# EAGLE board telemetry-shorter (EAGLE 7.7.0)
REV: C
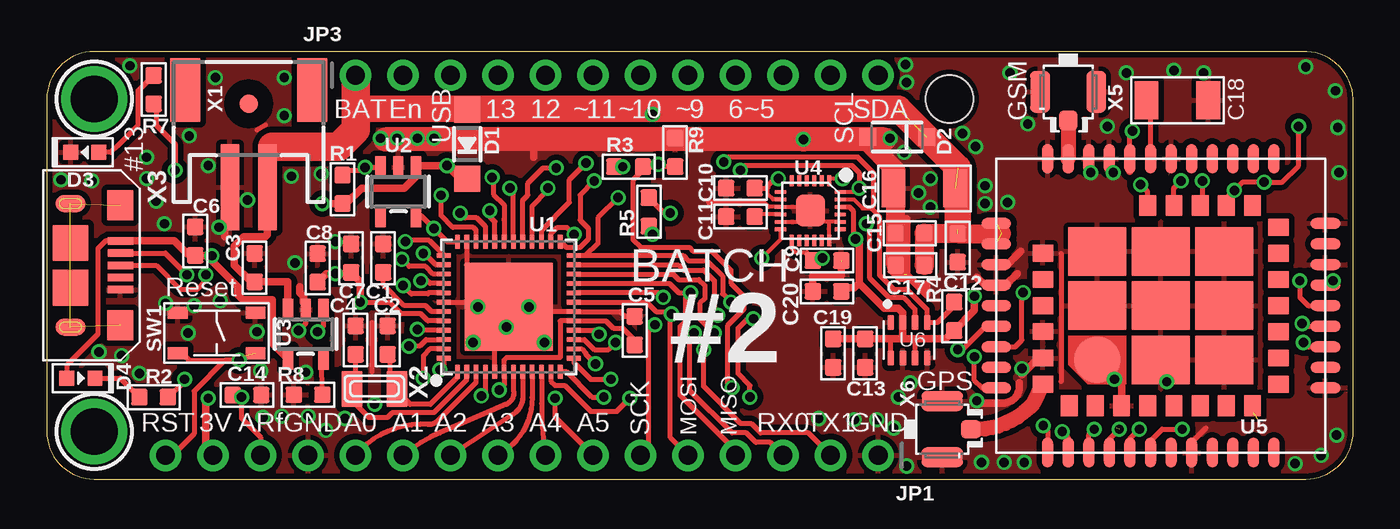
[diagram p0: board, top side]
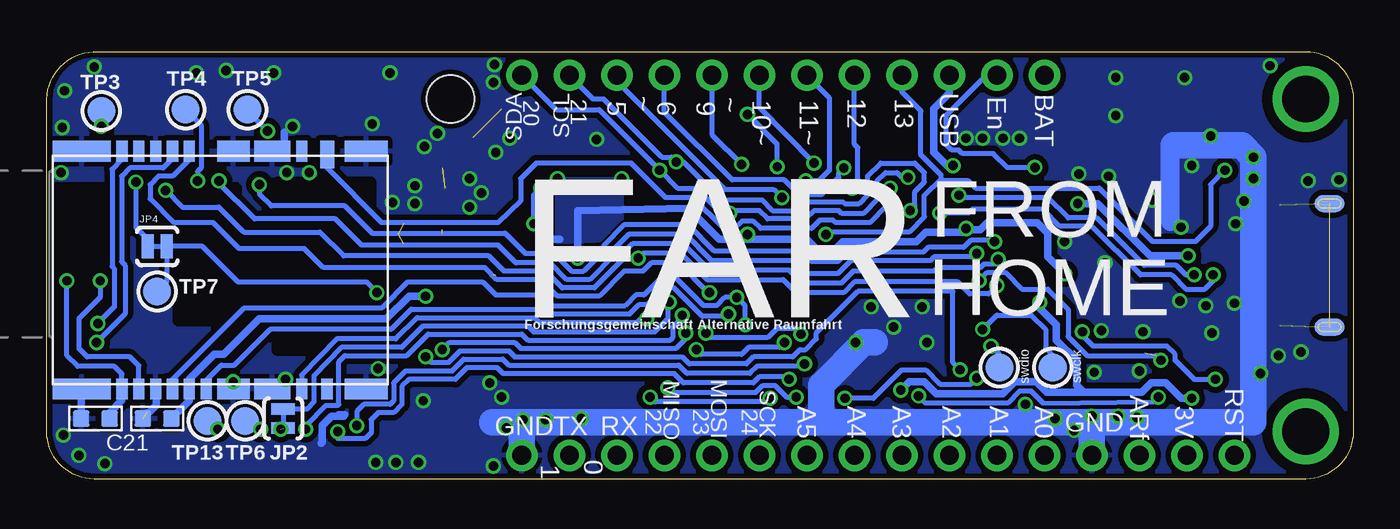
[diagram p1: board, bottom side, seen from below]

Size 69.85 x 22.86 mm. Coordinates in mm from the lower left corner, seen from the top.
Outline: 2.54,0 67.31,0 arc90 69.85,2.54 69.85,20.32 arc90 67.12,22.86 2.54,22.86 arc90 0,20.32 0,2.54 arc90 2.54,0
Copper layers (1*16): Top 0.035mm / dielectric 1.5mm / Bottom 0.035mm
Design rules "MacroFab_MF_Standard_2_Layer": minimum track width 5mil, minimum drill 12mil, track to track 5mil, track to pad 5mil, pad to pad 5mil, via to via 5mil, smd to smd 0mil, copper to edge 10mil, drill to drill 10mil, minimum pad ring 6mil, minimum via ring 6mil, stop-mask expansion 2mil, vias tented up to drill 25mil, thermal gap 10mil
Holes 2.54 mm at 48.26,20.32

## Footprints (pad centres in the part's own frame; a part is rotated, then mirrored left to right if it is on the bottom)
C0603 = smd 0.889 x 0.889: 1 0,0.762; 2 0,-0.762
C1206 = smd 1.27 x 2.032: 1 -1.651,0; 2 1.651,0
SOD-123 = smd 1.4 x 1.4: A 1.85,0; C -1.85,0
SOD-123' = smd 0.9 x 0.95: A 1.575,0; C -1.575,0
LED0603 = smd 0.8 x 0.8: ANODE 0.75,0; CATHODE -0.75,0
1X16_ROUND = drill 1 pad 1.676: 1 -19.05,0; 2 -16.51,0; 3 -13.97,0; 4 -11.43,0; 5 -8.89,0; 6 -6.35,0; 7 -3.81,0; 8 -1.27,0; 9 1.27,0; 10 3.81,0; 11 6.35,0; 12 8.89,0; 13 11.43,0; 14 13.97,0; 15 16.51,0; 16 19.05,0
PAD-JUMPER-2-NC_BY_TRACE_YES_SILK = smd 0.635 x 1.27: 1 -0.508,0; 2 0.508,0
1X12_ROUND = drill 1 pad 1.676: 1 -13.97,0; 2 -11.43,0; 3 -8.89,0; 4 -6.35,0; 5 -3.81,0; 6 -1.27,0; 7 1.27,0; 8 3.81,0; 9 6.35,0; 10 8.89,0; 11 11.43,0; 12 13.97,0
R0603 = smd 0.889 x 0.889: 1 0,0.762; 2 0,-0.762
TACT4.2MM = smd 1.05 x 0.65: P$1 -2.075,1.075; P$2 2.075,1.075; P$3 -2.075,-1.075; P$4 2.075,-1.075
TESTPOINT_ROUND_1.5MM = smd 1.5 x 1.5: P$1 0,0
TQFN48_7MM = smd 0.25 x 0.75: 1 -2.75,-3.475; 2 -2.25,-3.475; 3 -1.75,-3.475; 4 -1.25,-3.475; 5 -0.75,-3.475; 6 -0.25,-3.475; 7 0.25,-3.475; 8 0.75,-3.475; 9 1.25,-3.475; 10 1.75,-3.475; 11 2.25,-3.475; 12 2.75,-3.475; 25 2.75,3.475; 26 2.25,3.475; 27 1.75,3.475; 28 1.25,3.475; 29 0.75,3.475; 30 0.25,3.475; 31 -0.25,3.475; 32 -0.75,3.475; 33 -1.25,3.475; 34 -1.75,3.475; 35 -2.25,3.475; 36 -2.75,3.475 | smd 0.75 x 0.25: 13 3.475,-2.75; 14 3.475,-2.25; 15 3.475,-1.75; 16 3.475,-1.25; 17 3.475,-0.75; 18 3.475,-0.25; 19 3.475,0.25; 20 3.475,0.75; 21 3.475,1.25; 22 3.475,1.75; 23 3.475,2.25; 24 3.475,2.75; 37 -3.475,2.75; 38 -3.475,2.25; 39 -3.475,1.75; 40 -3.475,1.25; 41 -3.475,0.75; 42 -3.475,0.25; 43 -3.475,-0.25; 44 -3.475,-0.75; 45 -3.475,-1.25; 46 -3.475,-1.75; 47 -3.475,-2.25; 48 -3.475,-2.75 | smd 4.7 x 4.7: THERMAL 0,0
SOT23-5 = smd 0.55 x 1.2: 1 -0.95,-1.3; 2 0,-1.3; 3 0.95,-1.3; 4 0.95,1.3; 5 -0.95,1.3
LEAD-QFN24 = smd 0.6 x 0.2: 1 -1.6,1; 2 -1.6,0.6; 3 -1.6,0.2; 4 -1.6,-0.2; 5 -1.6,-0.6; 6 -1.6,-1; 13 1.6,-1; 14 1.6,-0.6; 15 1.6,-0.2; 16 1.6,0.2; 17 1.6,0.6; 18 1.6,1 | smd 0.2 x 0.6: 7 -1,-1.6; 8 -0.6,-1.6; 9 -0.2,-1.6; 10 0.2,-1.6; 11 0.6,-1.6; 12 1,-1.6; 19 1,1.6; 20 0.6,1.6; 21 0.2,1.6; 22 -0.2,1.6; 23 -0.6,1.6; 24 -1,1.6 | smd 1.7 x 1.54: 25 0,0
SIM868 = smd 1.6 x 0.6: 1_ -7.85,6.05; 2_ -7.85,4.95; 3_ -7.85,3.85; 4_ -7.85,2.75; 5_ -7.85,1.65; 6_ -7.85,0.55; 7_ -7.85,-0.55; 8_ -7.85,-1.65; 9_ -7.85,-2.75; 10_ -7.85,-3.85; 11_ -7.85,-4.95; 12_ -7.85,-6.05; 22_ 7.85,-6.05; 23_ 7.85,-4.95; 24_ 7.85,-3.85; 25_ 7.85,-2.75; 26_ 7.85,-1.65; 27_ 7.85,-0.55; 28_ 7.85,0.55; 29_ 7.85,1.65; 30_ 7.85,2.75; 31_ 7.85,3.85; 32_ 7.85,4.95; 33_ 7.85,6.05 | smd 0.6 x 1.6: 13_ -4.4,-8.8; 14_ -3.3,-8.8; 15_ -2.2,-8.8; 16_ -1.1,-8.8; 17_ 0,-8.8; 18_ 1.1,-8.8; 19_ 2.2,-8.8; 20_ 3.3,-8.8; 21_ 4.4,-8.8; 34_ 4.4,8.8; 35_ 3.3,8.8; 36_ 2.2,8.8; 37_ 1.1,8.8; 38_ 0,8.8; 39_ -1.1,8.8; 40_ -2.2,8.8; 41_ -3.3,8.8; 42_ -4.4,8.8 | smd 1.1 x 0.9: 43_ -5.35,4.9; 44_ -5.35,3.5; 45_ -5.35,2.1; 46_ -5.35,0.7; 47_ -5.35,-0.7; 48_ -5.35,-2.1; 49_ -5.35,-3.5; 50_ -5.35,-4.9; 58_ 5.35,-4.9; 59_ 5.35,-3.5; 60_ 5.35,-2.1; 61_ 5.35,-0.7; 62_ 5.35,0.7 | smd 0.9 x 1.1: 51_ -4.2,-6.3; 52_ -2.8,-6.3; 53_ -1.4,-6.3; 54_ 0,-6.3; 55_ 1.4,-6.3; 56_ 2.8,-6.3; 57_ 4.2,-6.3; 63_ 2.8,6.3; 64_ 1.4,6.3; 65_ 0,6.3; 66_ -1.38,6.3; 67_ -2.8,6.3; 68_ -4.2,6.3 | smd 2.5 x 2.5: 69_ -2.9,3.4 | smd 2.6 x 3.1: 70_ -2.9,0; 71_ -2.9,-3.4; 72_ 0,-3.4; 73_ 2.9,-3.4; 74_ 2.9,0; 75_ 2.9,3.4; 76_ 0,3.4; 77_ 0,0
LGA-8 = smd 0.8 x 0.35: P1 0.95,0.975; P2 0.95,0.325; P3 0.95,-0.325; P4 0.95,-0.975; P5 -0.95,-0.975; P6 -0.95,-0.325; P7 -0.95,0.325; P8 -0.95,0.975
MOUNTINGHOLE_2.5_PLATED = drill 2.5 pad 3.2: P$1 0,0
FIDUCIAL_1MM = smd 1 x 1: 1 0,0
JSTPH2 = smd 1 x 4.6: 1 -1,-3.7; 2 1,-3.7 | smd 1.6 x 3.4: NC1 -3.4,1.5; NC2 3.4,1.5
XTAL3215 = smd 1.1 x 1.9: P$1 1.2,0; P$2 -1.2,0
MICROUSB-RIGHT = smd 0.4 x 1.35: 1 -1.3,1.27; 2 -0.65,1.27; 3 0,1.27; 4 0.65,1.27; 5 1.3,1.27 | smd 0.9 x 1.6: S1 -3.3,-1.4; S2 3.3,-1.4 | smd 1.6 x 1.4: S3 -3.2,1.27; S4 3.2,1.27 | smd 1.9 x 1.9: S5 -1.2,-1.405; S6 1.2,-1.405 | smd 0.9 x 1.6 bottom: S7 -3.3,-1.4; S8 3.3,-1.4
MOLEX-SD+SIM-104239 = smd 1.1 x 0.6: C1 6.35,-5.25; C2 6.35,-4.35; C3 -6.35,-5.25; C5 6.35,-3.45; C6 -6.35,-4.35; C7 -6.35,-2.55; T1 6.35,5.715; T2 6.35,4.36; T3 6.35,-0.75; T4 6.35,-1.65; T5 6.35,-2.55; T6 -6.35,-3.45; T7 -6.35,-1.65; T8 -6.35,4.36 | smd 1.1 x 3.1: G1 -6.35,-7.4; G8 6.35,-7.4 | smd 1.1 x 1.72: G2 -6.35,0.71; G7 6.35,0.71 | smd 1.1 x 1.94: G3 -6.35,2.79; G6 6.35,2.79 | smd 1.1 x 2.3: G4 -6.35,7.8; G5 6.35,7.8 | smd 1.45 x 0.75: S/W -6.175,5.715
U-FL3P-SMD-2.6X2.6X1.0MM = smd 1.05 x 1: D -1.524,0 | smd 2.2 x 1.05: GND1 0,1.5; GND2 0,-1.5

## Placement (x,y rotation side)
C1  1uf  [C0603]  17.98,11.81 180 top
C2  22pf  [C0603]  18.22,7.43 180 top
C3  10uf  [C0603]  11.11,11.3 180 top
C4  22pf  [C0603]  16.51,7.43 180 top
C5  10uf  [C0603]  31.43,7.94 180 top
C6  10uf  [C0603]  7.93,12.72 180 top
C7  1uf  [C0603]  16.27,11.81 180 top
C8  10uf  [C0603]  14.48,11.29 180 top
C9  100nf  [C0603]  41.72,11.68 270 top
C10  10nf  [C0603]  37.08,15.56 90 top
C11  100nf  [C0603]  37.08,14.03 90 top
C12  10pf  [C0603]  48.7,12.36 0 top
C13  100nf  [C0603]  43.75,6.73 180 top
C14  1uf  [C0603]  10.7,4.5 90 top
C15  33pf  [C0603]  46.14,13.14 270 top
C16  100uf  [C1206]  46.93,15.54 180 top
C17  10uf  [C0603]  46.16,11.43 270 top
C18  100uf  [C1206]  60.45,20.26 0 top
C19  10nf  [C0603]  42.04,6.73 180 top
C20  10uf  [C0603]  41.72,10.03 90 top
C21  100nf  [C0603]  67.25,3.24 90 bottom
C28  10uf  [C0603]  63.94,3.24 90 bottom
D1  MBR120ESFT3G  [SOD-123]  22.48,17.91 90 top
D2  MMSZ5231BT1G  [SOD-123']  45.47,18.29 180 top
D3  MF-LED-0603-RED  [LED0603]  2.03,17.46 0 top
D4  MF-LED-0603-GREEN  [LED0603]  1.83,5.4 180 top
JP1  [1X16_ROUND]  25.4,1.27 180 top
JP2  JUMPER-PAD-2-NC_BY_TRACE  [PAD-JUMPER-2-NC_BY_TRACE_YES_SILK]  57.21,3.24 270 bottom
JP3  [1X12_ROUND]  30.48,21.59 0 top
JP4  JUMPER-PAD-2-NC_BY_TRACE  [PAD-JUMPER-2-NC_BY_TRACE_YES_SILK]  63.94,12.45 0 bottom
R1  100K  [R0603]  15.81,15.49 180 top
R2  1K  [R0603]  5.71,4.38 90 top
R3  100K  [R0603]  31.11,16.7 90 top
R4  4.7K  [R0603]  48.51,8.7 0 top
R5  4.7K  [R0603]  32.19,14.29 0 top
R7  1K  [R0603]  5.71,20.83 180 top
R8  10K  [R0603]  13.97,4.51 270 top
R9  100K  [R0603]  33.59,17.46 180 top
SW1  MF-SW-TACT-4.2MM  [TACT4.2MM]  9.08,7.81 180 top
TP1  [TESTPOINT_ROUND_1.5MM]  16.07,5.97 0 bottom
TP2  [TESTPOINT_ROUND_1.5MM]  18.92,5.97 0 bottom
TP3  [TESTPOINT_ROUND_1.5MM]  66.93,19.68 0 bottom
TP4  [TESTPOINT_ROUND_1.5MM]  62.42,19.75 0 bottom
TP5  [TESTPOINT_ROUND_1.5MM]  59.12,19.75 0 bottom
TP6  [TESTPOINT_ROUND_1.5MM]  59.25,3.11 0 bottom
TP7  [TESTPOINT_ROUND_1.5MM]  63.94,10.03 0 bottom
TP13  [TESTPOINT_ROUND_1.5MM]  61.25,3.11 0 bottom
U1  ATSAMD21G18A-MUT  [TQFN48_7MM]  24.7,9.21 0 top
U2  SPX3819M5-L-3-0  [SOT23-5]  18.8,15.37 180 top
U3  MCP73831T-2ACI/OT  [SOT23-5]  13.84,7.75 180 top
U4  MPU-9250  [LEAD-QFN24]  40.83,14.35 270 top
U5  SIM868  [SIM868]  59.56,9.27 90 top
U6  BMP280  [LGA-8]  46.1,7.43 90 top
U$31  MOUNTINGHOLE2.5  [MOUNTINGHOLE_2.5_PLATED]  2.54,20.32 270 top
U$32  MOUNTINGHOLE2.5  [MOUNTINGHOLE_2.5_PLATED]  2.54,2.54 270 top
U$34  FIDUCIAL""  [FIDUCIAL_1MM]  10.79,20.07 270 top
X1  S2B-PH-SM4-TB(LF)(SN)  [JSTPH2]  10.79,19.3 0 top
X2  FC-135 32.7680KA-A3  [XTAL3215]  17.53,4.83 0 top
X3  MF-CON-MICROUSB-RIGHT  [MICROUSB-RIGHT]  2.67,11.43 270 top
X4  104239-1430  [MOLEX-SD+SIM-104239]  60.58,11.18 270 bottom
X5  U.FL-R-SMT(10)  [U-FL3P-SMD-2.6X2.6X1.0MM]  54.61,20.7 90 top
X6  U.FL-R-SMT(10)  [U-FL3P-SMD-2.6X2.6X1.0MM]  47.88,2.67 180 top

## Library data of the parts
C1 C7 C14 = Seeed-Capacitor-2016; MPN: CC0603KRX7R8BB105
C2 C4 = Seeed-Capacitor-2016; MPN: CC0603JRNPO9BN220
C3 C5 C6 C17 C20 C28 = Seeed-Capacitor-2016; MPN: CC0603KRX5R6BB106
C8 = Seeed-Capacitor-2016; COMPANY: ADAFRUIT INDUSTRIES; DRAWN: KTOWN; MPN: CC0603KRX5R6BB106; REV: A
C9 C11 C13 C21 = Seeed-Capacitor-2016; MPN: CC0603KRX7R9BB104
C10 C19 = Seeed-Capacitor-2016; MPN: CC0603KRX7R9BB103
C12 = Seeed-Capacitor-2016; MPN: CC0603JRNPO9BN100
C15 = Custom; MPN: CC0603JRNPO9BN330
C16 C18 = Seeed-Capacitor-2016; MPN: GRM31CR60J107ME39L
D1 JP1 JP3 TP1-TP7 TP13 U1-U3 X1 = microbuilder
D2 = Deegou-Diodes; MFR: ON SEMICONDUCTOR; MPN: MMSZ5231BT1G
D3 = MF_LEDs; HOUSEPART: YES; MPN: MF-LED-0603-RED; POPULATE: 1; URL: https://factory.macrofab.com/part/MF-LED-0603-RED
D4 = MF_LEDs; HOUSEPART: YES; MPN: MF-LED-0603-GREEN; POPULATE: 1; URL: https://factory.macrofab.com/part/MF-LED-0603-GREEN
JP2 JP4 = SparkFun-Passives
R1 = Seeed-Resistor-2016; MPN: RC0603JR-07100KL; VALUE: 100K 1/10W
R2 R7 = Seeed-Resistor-2016; MPN: RC0603JR-071KL; VALUE: 1K 1/10W
R3 R9 = Seeed-Resistor-2016; MPN: RC0603FR-07100KL
R4 R5 = Seeed-Resistor-2016; MPN: RC0603JR-074K7L
R8 = Seeed-Resistor-2016; MPN: RC0603JR-0710KL; VALUE: 10K 1/10W
SW1 = MF_Switches; HOUSEPART: YES; MPN: MF-SW-TACT-4.2MM; POPULATE: 1; URL: https://factory.macrofab.com/part/MF-SW-TACT-4.2MM
U4 = misc
U5 = SIM868
U6 = BMP280
U$31 U$32 U$34 = microbuilder; BOM: EXCLUDE
X2 = adafruit2
X3 = MF_Connectors; HOUSEPART: YES; MPN: MF-CON-MICROUSB-RIGHT; POPULATE: 1; URL: https://factory.macrofab.com/part/MF-CON-MICROUSB-RIGHT
X4 = SimSdCombo; MPN: VSHO-21-3301
X5 X6 = Seeed-Connector -2016

## Nets
!RESET: JP1.16 SW1.P$1 SW1.P$2 U1.40
+3V: C5.1 C7.1 C8.1 C9.2 C10.2 C13.2 C19.2 C20.2 C28.2 JP1.15 R4.2 R5.2 U1.6 U1.17 U1.36 U1.44 U2.5 U4.1 U4.8 U4.13 U4.22 U6.P2 U6.P6 U6.P8 X4.T4
A0: JP1.12 U1.3
A1: JP1.11 U1.7
A2: JP1.10 U1.8
A3: JP1.9 U1.9
A4: JP1.8 U1.10
A5: JP1.7 U1.47
AREF: C14.1 JP1.14 U1.4
D0/RX0/CTS2: JP1.3 U1.16
D1/TX0: JP1.2 U1.15
D3/RX2/GSM_TX: U1.14 U5.1_
D4/TX2/GSM_RX: U1.13 U5.2_
D5/CTS2: JP2.1 JP3.10 U1.24
D6: JP3.9 U1.29
D7/SD_DET: U1.30 X4.S/W
D8/SD_CS: U1.11 X4.T2
D9/VOLT: JP3.8 R3.2 R9.1 U1.12
D10: JP3.7 U1.27
D11: JP3.6 U1.25
D12: JP3.5 U1.28
D13/RLED: JP3.4 R7.1 U1.26
D+: U1.34 X3.3
D-: U1.33 X3.2
EN: JP3.2 R1.2 U2.3
GND: C1.2 C2.2 C3.2 C4.2 C5.2 C6.2 C7.2 C8.2 C9.1 C10.1 C11.1 C12.2 C13.1 C14.2 C15.2 C16.2 C17.2 C18.2 C19.1 C20.1 C21.1 C28.1 D2.A D3.CATHODE JP1.1 JP1.13 R8.2 R9.2 SW1.P$3 SW1.P$4 U1.5 U1.18 U1.35 U1.42 U1.THERMAL U2.2 U3.2 U4.9 U4.11 U4.18 U4.20 U4.25 U5.8_ U5.13_ U5.19_ U5.21_ U5.27_ U5.30_ U5.31_ U5.33_ U5.36_ U5.37_ U5.45_ U5.63_ U5.66_ U5.67_ U5.69_ U5.70_ U5.71_ U5.72_ U5.73_ U5.74_ U5.75_ U5.76_ U5.77_ U6.P1 U6.P5 U6.P7 X1.1 X3.5 X4.C5 X4.G1 X4.G2 X4.G3 X4.G4 X4.G5 X4.G6 X4.G7 X4.G8 X4.T6 X5.GND1 X5.GND2 X6.GND1 X6.GND2
GPS_1PPS: TP4.P$1 U5.60_
GPS_ANT: U5.68_ X6.D
GPS_EN: JP4.1 TP3.P$1 U1.39 U5.59_
GSM_ANT: U5.32_ X5.D
GSM_DCD: TP6.P$1 U5.5_
GSM_DTR: TP13.P$1 U5.6_
GSM_RI: U5.7_
MISO: JP1.4 U1.21 X4.T7
MOSI: JP1.5 U1.19 X4.T3
MPU_INT: U1.41 U4.12
N$1: D4.CATHODE R2.1
N$3: R2.2 U3.1
N$4: R8.1 U3.5
N$5: C2.1 U1.1 X2.P$1
N$6: JP2.2 U5.4_
N$7: C4.1 U1.2 X2.P$2
N$8: D3.ANODE R7.2
N$23: C11.2 U4.10
N$29: C18.1 U5.28_
NETLIGHT: U5.41_
PWRKEY: U1.22 U5.39_
RF_SYNC: TP5.P$1 U5.29_
RTS2: U1.23 U5.3_
RX5/GPS_TX: U1.38 U5.61_
SCK: JP1.6 U1.20 X4.T5
SCL: JP3.11 R4.1 U1.32 U4.23 U6.P4
SDA: JP3.12 R5.1 U1.31 U4.24 U6.P3
SIM2_VDD: U5.56_
SIM_CLK: U5.16_ X4.C3
SIM_DATA: U5.15_ X4.C7
SIM_RST: U5.17_ X4.C2
SIM_VDD: C21.2 U5.18_ X4.C1
SLD: X3.S1 X3.S2 X3.S3 X3.S4 X3.S5 X3.S6
STATUS: U1.48 U5.42_
SWCLK: TP1.P$1 U1.45
SWDIO: TP2.P$1 U1.46
TX5/GPS_RX: U1.37 U5.62_
USB_VBUS: U5.24_
VBAT: C3.1 C12.1 C15.1 C16.1 C17.1 D1.A D2.C JP3.1 R3.1 U3.3 U5.34_ U5.35_ X1.2
VBUS: C6.1 D1.C D4.ANODE JP3.3 R1.1 U2.1 U3.4 X3.1
VDD_EXT_2V8: JP4.2 TP7.P$1 U5.40_
VDDCORE: C1.1 U1.43

## Tracks (layer width: path | path; a pad name or v marks a point on that pad's centre or on a via)
!RESET  (via drill 0.5)  (1 unrouted)
  Top 0.254: JP1.16 6.73,1.27 7.87,2.41 7.87,4.7 9.52,6.34 v10.28,6.34 v10.29,6.35 7.62,6.35 | U1.40 20.49,10.46 20.34,10.6 v20,10.6 | 7.57,6.35 7.62,6.35 | SW1.P$2 7.23,6.74 7.62,6.35
  Bottom 0.254: v20,10.6 19.56,11.05 18.61,11.05 17.72,10.16 16.32,10.16 15.24,9.08 15.24,7.62 14.22,6.6 10.54,6.6 v10.29,6.35
+3V  (via drill 0.5)
  Top 0.203: U4.8 38.83,14.95 38.54,15.24 38.54,15.56 | v42.55,16.07 41.88,16.07 U4.1 | U4.13 39.83,12.3 40.01,12.13 40.64,12.13 C9.2
  Top 0.254: v24.19,4.76 24.45,5.02 U1.6 24.45,6.37 24.57,6.49 27.45,6.49 27.45,8.46 U1.17 29.9,8.46 30.29,8.06 30.8,8.06 31.5,7.37 C5.1 | v16.76,9.46 18.31,9.46 18.94,8.83 20,8.83 20.37,8.46 U1.44 | U1.36 21.42,12.68 v20.7,13.4 20.03,14.07 U2.5 | U4.22 42.92,14.55 43.12,14.35 43.12,12.83 v43.24,12.83 | R5.2 32.38,13.53 v32.38,13.08 | C10.2 38.54,15.56 38.54,15.68 38.92,16.07 v39.12,16.07 | U6.P6 46.43,7.49 | U6.P8 45.13,7.49 | C9.2 v41.47,11.81
  Top 0.406: C7.1 16.38,10.99 16.38,10.92 16.76,10.54 v16.76,9.46 | C7.1 16.29,11.01 | JP1.15 8.51,1.65 8.51,4.19 v8.64,4.32 | C7.1 16.2,10.99 v15.43,10.99 14.94,10.99 C8.1 | 45.78,7.49 45.13,7.49 C13.2 C19.2 | 45.78,7.49 46.43,7.49 48.07,7.49 R4.2 49.59,9.02 v49.59,9.78 | 45.78,7.49 U6.P2 45.78,8.9 45.53,9.14 44.77,9.14 43.43,10.48 | 43.43,10.48 43.43,12.64 v43.24,12.83 | C20.2 42.67,10.22 43.18,10.22 43.43,10.48
  Bottom 0.406: v16.76,9.46 16.76,9.14 15.88,8.26 15.88,7.43 14.8,6.35 14.8,5.02 14.41,4.64 | 8.76,4.45 v8.64,4.32 9.21,4.32 10.03,5.14 10.79,5.14 11.3,4.64 14.41,4.64 | v15.43,10.99 16.32,11.87 16.32,13.14 16.89,13.72 19.56,13.72 19.94,13.34 20.64,13.34 v20.7,13.4 | v24.19,4.76 23.75,5.21 22.92,5.21 22.29,4.57 18.73,4.57 18.1,5.21 16.95,5.21 16.38,4.64 14.41,4.64 | 20.64,13.46 v20.7,13.4 | 32.45,12.83 29.21,12.83 28.57,12.19 27.81,12.19 27.3,12.7 23.37,12.7 22.86,13.21 20.89,13.21 v20.7,13.4 | 32.45,12.83 33.91,12.83 35.56,14.48 41.47,14.35 v41.47,11.81 | v32.38,13.08 32.45,12.83 | v43.24,12.83 42.42,12.83 | C28.2 62.23,4.19 X4.T4 62.23,5.33 60.9,6.67 60.39,6.67 58.48,8.57 51.69,8.57 50.48,9.78 v49.59,9.78
  pour Bottom: 42.55,12.64 42.55,16.07 39.12,16.07 39.12,12.76
A0
  Top 0.254: U1.3 22.95,5.17 20.89,3.11 arc-49 20.38,2.92 arc54 JP1.12
A1
  Top 0.254: U1.7 24.95,4.76 arc-81 24.57,4 arc0 21.02,2.48 arc16 JP1.11
A2
  Top 0.254: U1.8 25.45,4.37 arc-59 24.96,3.49 JP1.10
A3
  Top 0.254: U1.9 25.95,4.36 arc-61 JP1.9
A4
  Top 0.254: U1.10 26.45,4.03 arc9 JP1.8
A5  (via drill 0.5)
  Top 0.254: U1.47 20.48,6.96 20.13,6.6 v20.13,5.4 | JP1.7 27.18,3.3 v27.18,4.32
  Bottom 0.254: v27.18,4.32 25.65,4.32 24.13,5.84 22.86,5.84 22.1,5.08 20.45,5.08 v20.13,5.4
AREF  (via drill 0.5)
  Top 0.254: U1.4 23.45,4.66 v23.24,4.45 | C14.1 10.06,4.38 v10.41,4.38 10.41,3.25 11.43,2.23 JP1.14
  Bottom 0.254: v10.41,4.38 10.67,4.13 16.57,4.06 17.21,4.7 17.84,4.7 18.48,4.06 22.86,4.06 v23.24,4.45
D0/RX0/CTS2  (via drill 0.5)
  Top 0.254: U1.16 29.32,7.96 v29.53,7.75 | JP1.3 38.67,1.97 37.91,1.97 37.4,2.48 36.64,2.48 34.35,4.76 34.35,7.56 v34.61,7.81
  Bottom 0.254: v29.53,7.75 29.84,8.06 30.8,8.06 31.3,7.56 34.35,7.56 v34.61,7.81
D1/TX0  (via drill 0.5)
  Top 0.254: v35.12,6.92 35.12,4.95 37.08,2.98 37.66,2.98 38.16,2.48 40.7,2.48 JP1.2 | U1.15 28.74,7.46 29.27,6.92 30.04,6.92 v30.42,7.3
  Bottom 0.254: v35.12,6.92 34.86,6.67 32.7,6.67 32.32,7.05 30.67,7.05 v30.42,7.3
D3/RX2/GSM_TX  (via drill 0.5)
  Top 0.254: U1.14 28.6,6.96 28.83,6.73 28.83,6.67 v29.34,6.16 | v53.28,2.86 53.51,2.62 U5.1_
  Bottom 0.254: v29.34,6.16 29.46,6.03 31.88,6.03 32.26,5.65 35.62,5.65 36.07,6.1 45.15,6.1 45.47,6.41 47.56,6.41 48.2,5.78 50.67,5.78 51.31,5.14 51.31,4.19 51.5,4 52.9,4 53.28,3.62 v53.28,2.86
D4/TX2/GSM_RX  (via drill 0.5)
  Top 0.254: v54.29,2.54 54.61,2.23 U5.2_ | U1.13 28.18,6.24 29.08,5.33 v30.16,5.33
  Bottom 0.254: v30.16,5.33 30.29,5.46 31.75,5.46 32.07,5.14 35.81,5.14 36.32,5.65 45.47,5.65 45.78,5.97 47.37,5.97 48.01,5.33 50.48,5.33 50.86,4.95 50.86,4 51.31,3.56 52.13,3.56 52.51,3.17 52.51,2.48 52.83,2.16 54.29,2.16 v54.29,2.54
D5/CTS2  (via drill 0.5)
  Top 0.254: U1.24 28.83,11.96 | 28.83,11.96 34.02,11.96 34.29,11.68 35.31,11.68 36.13,10.86 36.13,9.91 v36.58,9.46 | v30.54,15.05 29.46,13.97 29.46,12.59 28.83,11.96
  Bottom 0.254: v30.54,15.05 30.99,15.49 33.59,15.49 39.37,21.27 JP3.10 | JP2.1 55.94,3.75 55.56,4.13 55.56,5.52 54.1,7.05 50.86,7.05 49.72,8.19 44.13,8.19 43.81,7.87 37.34,7.87 36.64,8.57 36.64,9.4 v36.58,9.46
D6  (via drill 0.5)
  Top 0.254: U1.29 25.45,14.91 25.72,15.18 25.72,15.81 26.54,16.64 v27.24,16.64
  Bottom 0.254: JP3.9 36.83,19.62 33.21,16 30.42,16 29.65,15.24 28.38,15.24 27.5,16.13 27.5,16.38 v27.24,16.64
D7/SD_DET  (via drill 0.5)
  Top 0.254: U1.30 24.95,15.36 v24.77,15.55 v24.77,15.56
  Bottom 0.254: v24.77,15.56 24.96,15.37 24.96,14.61 25.84,13.72 27.69,13.72 27.81,13.84 28.51,13.84 28.96,13.4 31.69,13.4 32.07,13.78 32.7,13.78 33.08,13.4 33.66,13.4 35.31,15.05 36.77,15.05 38.61,16.89 43.69,16.89 44.51,16.07 44.51,14.86 45.72,13.72 51.94,13.72 54.86,16.64 X4.S/W
D8/SD_CS  (via drill 0.5)
  Top 0.254: U1.11 26.95,5.24 27.18,5.02 27.69,5.02 29.08,3.62 30.48,3.62 v31.18,4.32 | v37.59,4.38 37.59,5.02 36.96,5.65 36.96,8.06 37.47,8.57 v37.78,8.57
  Bottom 0.254: v31.18,4.32 31.37,4.13 37.34,4.13 v37.59,4.38 | X4.T2 56.22,5.57 54.36,7.49 51.18,7.49 50.04,8.64 43.75,8.64 43.5,8.38 38.29,8.38 38.1,8.57 v37.78,8.57
D9/VOLT  (via drill 0.5)
  Top 0.254: 27.45,5.7 U1.12 27.8,5.73 29.15,4.38 v29.78,4.38 | R9.1 32.83,16.7 v32.7,16.83 32.58,16.7 R3.2 31.88,16.51 31.37,16 31.37,12.76 31.75,12.38 34.35,12.38 34.54,12.19 35.56,12.19 36.58,11.18 36.58,10.48 37.27,9.78 37.27,9.08 36.39,8.19 36.39,5.14 v36.64,4.89
  Bottom 0.254: v36.64,4.89 36.39,4.64 31.94,4.64 31.56,5.02 30.92,5.02 30.29,4.38 v29.78,4.38 | JP3.8 34.29,18.41 v32.7,16.83
D10  (via drill 0.5)
  Top 0.254: U1.27 26.45,13.31 27.94,14.8 27.94,16 v28.83,16.89
  Bottom 0.254: v28.83,16.89 31.75,19.88 JP3.7
D11  (via drill 0.5)
  Top 0.254: U1.25 27.47,12.7 27.79,12.38 28.51,12.38 28.96,12.83 28.96,13.4 28.51,13.84 28.51,15.18 v29.27,15.94
  Bottom 0.254: JP3.6 28,20.38 28,16.51 28.57,15.94 v29.27,15.94
D12  (via drill 0.5)
  Top 0.254: U1.28 25.95,14.59 26.8,15.43 v26.8,15.56
  Bottom 0.254: v26.8,15.56 26.48,15.88 26.48,17.72 26.67,17.91 JP3.5
D13/RLED  (via drill 0.5)
  Top 0.254: R7.1 5.84,19.72 5.84,18.92 6.86,17.91 v6.86,16.51 | U1.26 26.95,13.11 27.3,13.46 27.81,13.46 v28.19,13.08
  Bottom 0.254: 22.04,16.07 22.92,15.18 22.92,14.03 23.75,13.21 28.07,13.21 v28.19,13.08 | 22.04,16.07 22.04,16.26 23.11,17.34 23.11,19.68 24.13,20.7 JP3.4 | 22.04,16.07 21.91,15.94 20.57,15.94 20.19,15.56 13.59,15.56 10.73,12.7 8.45,12.7 7.62,13.53 7.62,15.75 v6.86,16.51
D+  (via drill 0.5)
  Top 0.254: U1.34 22.95,13.31 22.8,13.46 21.72,13.46 21.08,14.1 v21.08,15.18 | X3.3 5.84,11.43 7.11,10.16 8.06,10.16 8.51,10.6 v8.51,10.92
  Bottom 0.254: v21.08,15.18 20.95,15.05 16.32,15.05 15.24,13.97 13.72,13.97 11.18,11.43 9.46,11.43 8.95,10.92 v8.51,10.92
D-  (via drill 0.5)
  Top 0.254: v7.49,10.92 6.33,12.08 X3.2 | U1.33 23.45,13.51 22.99,13.97 22.35,13.97 v22.1,14.22
  Bottom 0.254: v22.1,14.22 20.57,14.22 20.38,14.41 16.57,14.41 15.68,13.53 13.97,13.53 11.37,10.92 9.72,10.92 8.95,10.16 7.94,10.16 7.49,10.6 v7.49,10.92
EN  (via drill 0.5)
  Top 0.254: 17.85,16.7 U2.3 v17.02,16.67 16.86,16.67 16.7,16.51 16.04,16.51 R1.2
  Bottom 0.254: JP3.2 19.62,21.59 21.78,19.43 21.78,17.91 21.46,17.59 21.08,17.59 20.89,17.4 19.24,17.4 18.51,16.67 v17.02,16.67
GND  (via drill 0.5)  (3 unrouted)
  Top 0.203: 38.35,14.8 38.6,14.55 U4.9 40.83,14.55 U4.25 40.83,13.75 | U4.20 41.83,13.75 | U4.18 41.83,13.75 | 41.83,13.75 40.83,13.75 | U4.11 40.83,13.75
  Top 0.254: U1.35 22.45,11.46 v24.57,8.13 | 24.45,9.46 v24.57,8.13 | U1.5 23.95,7.19 23.74,7.19 v22.8,7.3 | v24.57,8.13 24.95,8.96 U1.18 30.67,8.96 30.92,8.7 C5.2 | U1.42 21.27,9.46 22.35,9.46 arc-34 v23.05,9.21 | 17.4,5.71 17.4,8.38 | 11.68,18.92 11.24,18.67 | 54.23,12.06 54.23,5.21 | 38.35,14.8 35.37,14.8 | U3.2 13.84,8.32 v13.46,7.94 | U5.8_ 61.21,1.97 61.98,2.73
  Top 0.406: 26.04,18.48 26.04,17.21 | U5.45_ 57.46,6.37 U5.69_ | 9.53,12.95 9.53,13.65 9.78,13.91 9.78,13.97 | 46.16,10.73 47.05,9.84 47.05,10.41 | 46.16,10.73 45.59,10.73 45.15,11.18 45.4,11.49 | 40.96,10.29 40.96,10.86 42.48,10.86 42.48,11.62 | 52.01,5.14 52.01,4.95 arc-90 51.12,4.06 49.91,4.06 | 51.37,11.49 52.07,12.19 | 46.16,10.73 45.97,10.92 45.97,13.91 | 51.31,10.41 51.88,10.99 | 45.53,10.92 45.85,10.92 | 52.77,6.22 52.13,5.59 | 50.16,10.35 49.72,10.79 | 13.53,10.29 13.53,9.97 13.72,9.78 13.72,9.46 13.84,9.46 U3.2
  Top 1.016: C17.2 45.4,11.49 45.4,16.51 43.75,18.16
  Top 1.27: 44.77,18.16 v40.45,18.16 18.1,18.16
  Bottom 0.254: 15.24,12.76 15.18,12.83 | v10.73,14.92 10.48,14.92 10.16,15.24 | X4.G8 68.01,4.8
  Bottom 0.406: 64.01,4.57 64.01,3.94 64.39,3.56 64.52,3.56 | 68.01,4.8 C21.1 | 53.91,3.43 54.23,3.43 | 53.98,3.37 54.61,3.37 55.12,2.86 55.12,1.97 55.18,1.91 | 57.15,18.54 57.15,17.78
  Bottom 1.016: 9.78,13.78 9.78,17.65 9.59,17.84
  Bottom 1.422: JP1.13 13.97,3.05 | 13.97,3.05 28.45,3.05 | 28.45,3.05 44.45,3.05 | JP1.1 44.45,3.05 | 13.97,3.05 5.46,3.05 | 44.45,3.05 46.04,3.05 | 5.4,3.05 5.33,3.05 v5.33,17.21 5.97,17.84 9.59,17.84 | 25.59,7.3 26.16,7.3 28.45,5.02 28.45,3.05
  other vias: 7.62,18.35 11.24,7.87 8.64,16.76 13.08,16.19 17.84,18.22 9.02,21.46 12.7,19.43 12.7,21.46 14.67,16.32 4.45,22.1 57.72,21.72 17.53,4 4.95,5.65 9.27,9.53 5.33,16.07 0.76,16 4,6.6 9.21,13.46 25.78,9.21 60.26,21.84 5.84,14.86 26.61,7.3 61.85,21.72 68.96,2.35 66.74,0.83 6.35,9.4 45.97,21.21 45.91,22.16 51.37,14.8 51.5,21.72 49.97,0.89 52.26,0.89 46.61,15.3 47.24,14.54 41.27,3.24 43.18,3.17 44.39,3.17 18.73,18.22 19.81,18.22 20.7,18.22 7.87,9.27 2.41,15.94 7.56,7.81 6.29,13.65 45.09,18.22 47.24,16.07 48.96,18.48 49.66,17.78 50.16,15.68 50.16,14.73 45.85,17.46 51.18,0.89 57.02,16.38 52.45,18.99 52.13,5.91 57.09,5.33 59.88,5.21 68.14,1.27 55.82,16.38 69.02,18.8 68.9,20.76 67.31,22.03 69.09,16.38 56.71,18.86 49.72,4.19 45.53,4.38 46.16,5.14 45.28,2.73 45.97,0.7 12.57,3.37 13.97,3.37 15.94,3.24 14.92,2.6 11.56,3.3 13.27,11.56 11.43,5.78 13.84,5.71 15.43,12.7 2.79,6.79
  pour Top (isolate 0.305, rank 6): 0,22.86 0,0 69.98,0 69.98,22.86
  pour Bottom (isolate 0.305, rank 6): 69.98,0 0,0 0,22.86 69.98,22.86
GPS_1PPS  (via drill 0.5)
  Top 0.254: v61.78,15.94 61.78,14.74 U5.60_
  Bottom 0.254: 61.78,15.93 v61.78,15.94 | v61.78,15.94 61.78,16.26 | TP4.P$1 61.59,18.92 61.59,16.64 61.78,16.45 v61.78,15.94
GPS_ANT
  Top 0.813: X6.D arc52 52.77,4.06 U5.68_
GPS_EN  (via drill 0.5)
  Top 0.254: v18.99,11.75 19.37,11.37 20.26,11.37 20.67,10.96 U1.39 | U5.59_ 63.08,15.05 v63.5,15.43 63.94,15.88 v65.09,15.88 66.04,15.88 66.93,16.76 v66.93,18.86
  Bottom 0.254: v18.99,11.75 19.24,11.49 19.75,11.49 19.94,11.3 22.23,11.3 22.42,11.11 26.73,11.11 27.37,10.48 29.46,10.48 30.16,11.18 34.42,11.18 35.81,12.57 38.54,12.57 38.99,12.13 38.99,11.81 40.58,10.22 42.29,10.22 43.18,11.11 45.4,11.11 46.23,11.94 53.98,11.94 55.24,13.21 59.31,13.21 60.64,14.54 62.61,14.54 v63.5,15.43 | v66.93,18.86 TP3.P$1 | v65.09,15.88 65.09,13.46 64.45,12.83 JP4.1
GSM_ANT
  Top 0.813: U5.32_ arc-90 U5.32_ X5.D
GSM_DCD  (via drill 0.5)
  Top 0.254: U5.5_ 57.91,2.16 v58.42,2.67
  Bottom 0.254: TP6.P$1 59.12,2.67 v58.42,2.67
GSM_DTR  (via drill 0.5)
  Top 0.254: U5.6_ 59.01,2.05 59.63,2.67 v60.71,2.67
  Bottom 0.254: TP13.P$1 61.25,2.67 v60.71,2.67
MISO  (via drill 0.5)
  Top 0.254: JP1.4 36.83,1.52 33.85,4.51 33.85,8.13 34.16,8.45 34.16,9.72 v34.42,9.97 33.78,9.97 33.29,10.46 U1.21
  Bottom 0.254: v34.42,9.97 34.48,9.97 36.07,11.56 37.53,11.56 37.97,11.11 38.99,11.11 40.32,9.78 42.55,9.78 43.43,10.67 45.78,10.67 46.42,11.3 55.05,11.3 56.07,12.32 59.56,12.32 60.96,13.72 63.06,13.72 64.33,14.99 64.33,15.75 63.88,16.19 63.12,16.19 62.23,17.08 X4.T7
MOSI  (via drill 0.5)
  Top 0.254: JP1.5 33.34,2.22 33.34,8.76 v33.4,8.83 33.27,8.95 32.58,8.95 32.07,9.46 U1.19
  Bottom 0.254: X4.T3 61.33,5.28 60.52,6.1 59.82,6.1 57.91,8 51.44,8 50.35,9.08 43.37,9.08 43.12,8.83 38.67,8.83 38.16,9.34 37.72,9.34 36.83,10.22 36.32,10.22 34.8,8.7 33.53,8.7 v33.4,8.83
MPU_INT  (via drill 0.5)
  Top 0.203: v38.23,11.81 39.23,12.81 U4.12 39.43,13.35
  Top 0.254: v19.05,10.35 19.49,9.91 20.38,9.91 arc-90 20.43,9.96 U1.41
  Bottom 0.254: v19.05,10.35 19.49,9.91 20.51,9.91 21.14,10.54 26.67,10.54 27.24,9.97 29.78,9.97 30.48,10.67 34.54,10.67 35.94,12.06 37.97,12.06 v38.23,11.81
N$1
  Top 0.254: D4.CATHODE 3.94,5.4 R2.1
N$3  (via drill 0.5)
  Top 0.254: U3.1 14.79,8.19 v14.48,7.87 | 6.57,4.45 R2.2 6.6,4.47 7.37,5.23 v7.37,5.33
  Bottom 0.254: v7.37,5.33 8.51,5.33 9.53,6.35 9.53,6.67 9.97,7.11 13.91,7.11 14.48,7.68 v14.48,7.87
N$4
  Top 0.254: R8.1 14.69,6.35 U3.5
N$5
  Top 0.254: U1.1 21.95,5.44 20.51,4 19.42,4 18.98,4.45 X2.P$1 19.05,4.9 19.05,5.59 18.48,5.59 18.35,5.71 18.35,6.54 C2.1
N$6  (via drill 0.5)  (1 unrouted)
  Top 0.254: U5.4_ 56.81,2.14 v57.34,2.67
N$7
  Top 0.254: U1.2 22.45,5.31 20.7,3.56 18.48,3.56 18.22,3.3 17.21,3.3 16.89,3.63 16.58,3.94 X2.P$2 16.51,5.01 C4.1
N$8
  Top 0.254: R7.2 4.89,20.77 4.89,18.92 3.79,17.82 3.43,17.46 D3.ANODE
N$23
  Top 0.203: U4.10 37.96,14.15 C11.2
N$29
  Top 0.254: U5.28_ 59.01,19.71 58.8,19.94 C18.1
PWRKEY  (via drill 0.5)
  Top 0.254: U5.39_ 50.21,8.17 48.96,6.92 v48.7,6.92 | v35.69,7.81 34.92,8.57 34.92,9.4 35.18,9.65 35.18,10.35 34.86,10.67 33.78,10.67 33.49,10.96 U1.22
  Bottom 0.254: v35.69,7.81 35.69,7.49 36.2,6.99 44.51,6.99 44.83,7.3 48.32,7.3 v48.7,6.92
RF_SYNC  (via drill 0.5)
  Top 0.254: U5.29_ 57.91,18.48 v58.04,18.61
  Top 0.406: U5.29_ 57.91,16.45
  Bottom 0.254: TP5.P$1 59.12,19.68 v58.04,18.61
RTS2  (via drill 0.5)
  Top 0.254: U5.3_ 55.71,2.37 v56.01,2.67 | U1.23 33.76,11.46 34.04,11.18 35.12,11.18 35.69,10.6 35.69,8.95 v35.88,8.76
  Bottom 0.254: v56.01,2.67 56.01,2.86 54.93,3.94 54.29,3.94 54.23,4 54.23,6.29 53.91,6.6 50.61,6.6 49.47,7.75 44.45,7.75 44.13,7.43 36.51,7.43 36.39,7.56 36.39,8.13 35.88,8.64 v35.88,8.76
RX5/GPS_TX  (via drill 0.5)
  Top 0.254: U5.61_ 60.26,15.56 v60.64,15.94 | U1.38 20.8,11.46 20.19,12.06 v20.13,12.06
  Bottom 0.254: v60.64,15.94 60.64,15.81 58.74,13.91 54.42,13.91 53.02,12.51 45.72,12.51 44.77,11.56 42.93,11.56 42.04,10.67 40.83,10.67 39.5,12 39.5,12.32 38.73,13.08 35.69,13.08 34.29,11.68 29.84,11.68 29.15,10.99 27.56,10.99 26.86,11.68 22.61,11.68 22.42,11.87 20.38,11.87 20.19,12.06 v20.13,12.06
SCK  (via drill 0.5)
  Top 0.254: U1.20 32.72,9.96 v32.96,9.72 | JP1.6 32.19,1.71 32.19,7.94 v32.51,8.26
  Bottom 0.254: v32.51,8.26 32.51,9.27 v32.96,9.72 33.59,9.72 34.04,9.27 34.73,9.27 36.2,10.73 37.02,10.73 37.91,9.84 38.35,9.84 38.92,9.27 42.8,9.27 43.37,9.84 45.85,9.84 46.55,10.54 50.55,10.54 51.94,9.14 59.31,9.14 63.13,5.32 X4.T5
SCL  (via drill 0.5)
  Top 0.203: U4.23 43.15,14.95 43.62,14.48 44.07,14.48
  Top 0.254: U1.32 23.95,13.77 23.69,14.03 v23.69,14.35 | v36.2,16.95 36.45,17.21 43.37,17.21 44.2,16.38 44.2,14.61 44.07,14.48 44.51,14.03 44.51,10.92 45.28,10.16 45.97,10.16 47.05,9.08 47.05,8.53 U6.P4 47.63,8.38 48.51,9.27 R4.1
  Bottom 0.254: v23.69,14.35 23.43,14.61 23.43,15.37 22.92,15.88 22.92,16.38 23.43,16.89 25.27,16.89 25.97,16.19 25.97,15.18 26.42,14.73 27.18,14.73 27.24,14.8 29.21,14.8 29.65,14.35 31.05,14.35 31.62,14.92 33.78,14.92 35.81,16.95 v36.2,16.95 36.45,17.21 36.96,17.21 40.07,20.32 40.64,20.32 JP3.11
SDA  (via drill 0.5)
  Top 0.203: U4.24 43.16,15.35 43.56,15.75
  Top 0.254: U1.31 24.45,13.85 24.45,13.91 24.45,14.67 23.88,15.24 23.88,16.07 v23.81,16.13 | v37.08,16.51 37.34,16.76 43.05,16.76 43.43,16.38 v43.43,15.56 43.56,15.75 | v33.34,14.22 33.02,14.22 R5.1 | v43.81,13.65 44.01,13.46 44.01,10.73 45.02,9.72 45.78,9.72 46.42,9.08 46.42,8.51 U6.P3
  Bottom 0.254: JP3.12 42.61,19.75 40.32,19.75 v37.08,16.51 36.13,15.56 35.12,15.56 33.78,14.22 v33.34,14.22 33.21,14.35 31.75,14.35 31.3,13.91 29.27,13.91 28.83,14.35 27.5,14.35 27.37,14.22 26.16,14.22 25.46,14.92 25.46,15.94 25.02,16.38 24.38,16.38 24.13,16.13 v23.81,16.13 | v43.81,13.65 43.81,15.18 v43.43,15.56
SIM_CLK  (via drill 0.5)
  Top 0.254: v67.12,8.32 67.27,8.17 U5.16_
  Bottom 0.254: X4.C3 65.83,17.1 66.36,16.57 66.36,11.37 66.23,11.24 66.23,9.21 v67.12,8.32
SIM_DATA  (via drill 0.5)
  Top 0.254: v67.18,7.3 67.42,7.07 U5.15_
  Bottom 0.254: v67.18,7.3 65.66,8.83 65.66,11.43 65.85,11.62 65.85,16.19 65.41,16.64 63.63,16.64 63.13,17.14 X4.C7
SIM_RST  (via drill 0.5)
  Top 0.254: v66.99,10.6 66.99,9.72 67.44,9.27 U5.17_
  Bottom 0.254: X4.C2 64.93,6.06 65.41,6.54 67.69,6.54 68.14,6.99 68.14,8.57 66.99,9.72 v66.99,10.6
SIM_VDD  (via drill 0.5)
  Top 0.254: v68.77,10.6 68.54,10.37
  Top 0.406: 68.54,10.37 U5.18_
  Bottom 0.254: X4.C1 65.83,5.63 66.23,6.03 68.2,6.03 68.77,6.6 v68.77,10.6
  Bottom 0.406: X4.C1 65.83,4.21 66.48,3.56 C21.2
SLD  (5 unrouted)
STATUS  (via drill 0.5)
  Top 0.254: U1.48 21.23,6.05 v21.02,5.84 | U5.42_ 49.99,4.87 49.59,5.27 v49.59,6.54
  Bottom 0.254: v21.02,5.84 21.4,6.22 21.4,10.03 26.48,10.03 28.7,7.81 28.7,7.49 29.27,6.92 29.59,6.92 29.97,6.54 32.07,6.54 32.45,6.16 35.5,6.16 35.88,6.54 44.83,6.54 45.15,6.86 47.75,6.86 48.39,6.22 49.28,6.22 v49.59,6.54
SWCLK  (via drill 0.5)
  Top 0.254: U1.45 19.86,7.96 v19.81,8
  Bottom 0.254: TP1.P$1 16.07,6.6 16.45,6.99 16.45,8 17.21,8.76 19.05,8.76 v19.81,8
SWDIO  (via drill 0.5)
  Top 0.254: U1.46 20.29,7.46 19.94,7.11 v19.37,7.11
  Bottom 0.254: TP2.P$1 18.92,6.67 v19.37,7.11
TX5/GPS_RX  (via drill 0.5)
  Top 0.254: U5.62_ 58.86,15.37 v58.48,15.75 | v19.18,12.7 19.24,12.76 20.45,12.76 21.23,11.98 U1.37
  Bottom 0.254: v19.18,12.7 19.24,12.76 20.45,12.76 20.83,12.38 22.73,12.38 22.99,12.13 27.05,12.13 27.56,11.62 28.96,11.62 29.53,12.19 34.16,12.19 35.56,13.59 38.99,13.59 40.07,12.51 40.07,12.19 41.15,11.11 41.78,11.11 42.74,12.06 44.26,12.06 45.34,13.14 52.45,13.14 53.91,14.61 57.85,14.61 58.48,15.24 v58.48,15.75
VBAT  (via drill 0.5)  (5 unrouted)
  Top 0.254: 12.06,17.78 11.79,17.51 X1.2 | v32.38,19.49 32.38,19.81 | R3.1 v30.8,16.7 | 44.39,19.75 44.45,19.81
  Top 0.406: X1.2 11.79,13.06 11.68,12.95 10.54,12.95 10.03,12.45 10.03,11.43 10.92,10.54 C3.1 12.89,10.54 U3.3 | D1.A 22.48,20.32 16.51,20.32
  Top 1.016: 46.9,13.12 C12.1 51.05,13.12 | 46.9,13.12 C15.1 | 46.9,13.12 46.9,11.46 C17.1
  Top 1.422: 16.51,19.81 32.38,19.81 44.45,19.81 45.53,19.81 48.7,16.64 48.7,13.34
  Top 1.524: JP3.1 16.51,20.32 16.51,19.81 16.51,18.67 15.62,17.78 12.06,17.78
  Bottom 0.254: v30.8,16.7 30.8,17.91 v32.38,19.49
VBUS  (via drill 0.5)
  Top 0.254: 7.55,12.01 C6.1 | X3.1 3.14,12.73 2.73,12.32 2.73,7.75 1.08,6.1 D4.ANODE
  Top 0.406: U2.1 19.75,16.19 19.11,15.56 16.83,15.56 15.98,14.71 R1.1 v14.73,14.73 | 7.55,12.01 6.83,12.73 X3.1 | C6.1 8.03,11.94 v8.83,11.94 8.83,11.68 10.22,10.29 10.22,9.84 10.48,9.59 12.07,9.59 12.07,7.27 U3.4 | U2.1 19.75,16.76 | D1.C 22.04,16.12 v21.4,16.76 19.84,16.76 U2.1
  Bottom 0.406: 14.8,14.73 v14.73,14.73 13.65,14.73 10.86,11.94 v8.83,11.94 8.76,11.94 | JP3.3 21.59,20.64 22.42,19.81 22.42,17.46 21.72,16.76 v21.4,16.76
VDD_EXT_2V8  (via drill 0.5)
  Top 0.254: U5.40_ 51.77,7.07 52.13,7.43 52.13,9.91 v52.2,9.97
  Bottom 0.254: v52.2,9.97 52.77,10.54 59.63,10.54 61.53,12.45 JP4.2 63.44,10.54 TP7.P$1
VDDCORE
  Top 0.254: U1.43 20.57,8.96 20.26,9.27 19.12,9.27 17.98,10.4 C1.1

## Text on the board
tPlace: GSM | BAT | En | 13 | 12 | ~ | 11 | ~ | 10 | ~ | 9 | 6 | ~5 | SDA | USB | SCL | #13 | BATCH | Reset | #2 | GPS | SCK | MOSI | MISO | RST | 3V | ARf | GND | A0 | A1 | A2 | A3 | A4 | A5 | RX0 | TX1 | GND
bPlace: En | 13 | 12 | ~ | 9 | 6 | ~ | 5 | 21 | 20 | BAT | USB | 11~ | 10~ | SCL | SDA | FROM | FAR | HOME | Forschungsgemeinschaft Alternative Raumfahrt | swclk | swdio | MOSI | MISO | RST | 3V | ARf | GND | A0 | A1 | A2 | A3 | A4 | A5 | SCK | 24 | 23 | 22 | RX | TX | GND | 0 | 1